# Altium PCB cb_v2.PcbDoc
Units mm, origin at the board's own origin, x right, y up, seen from the top; angles counter-clockwise.
Board outline 140 x 55 mm, 2 copper layers (Top Layer, Bottom Layer); 57 components, 55 nets, 212 pads, 44 vias.
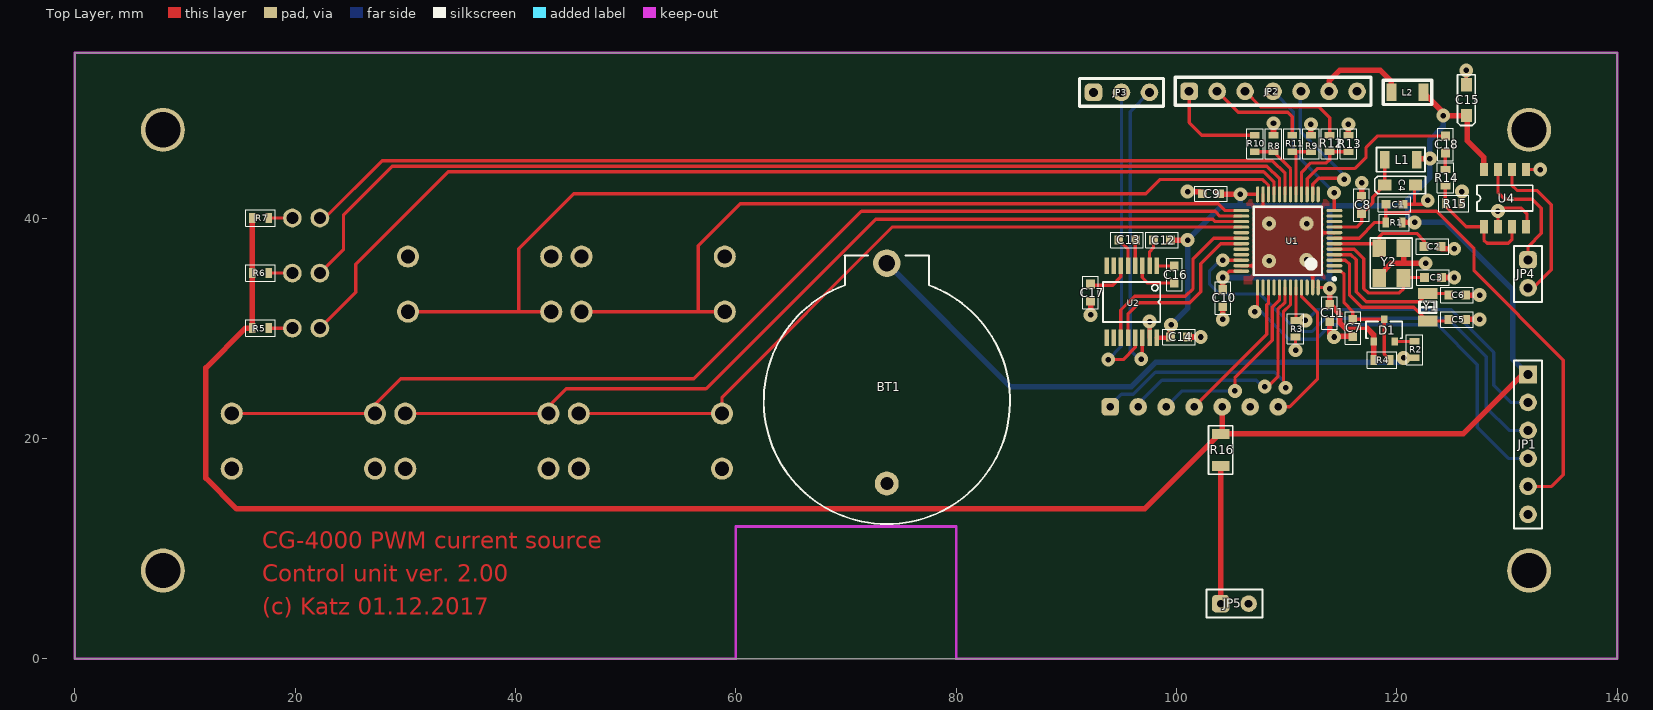
[diagram p0: Top Layer view]
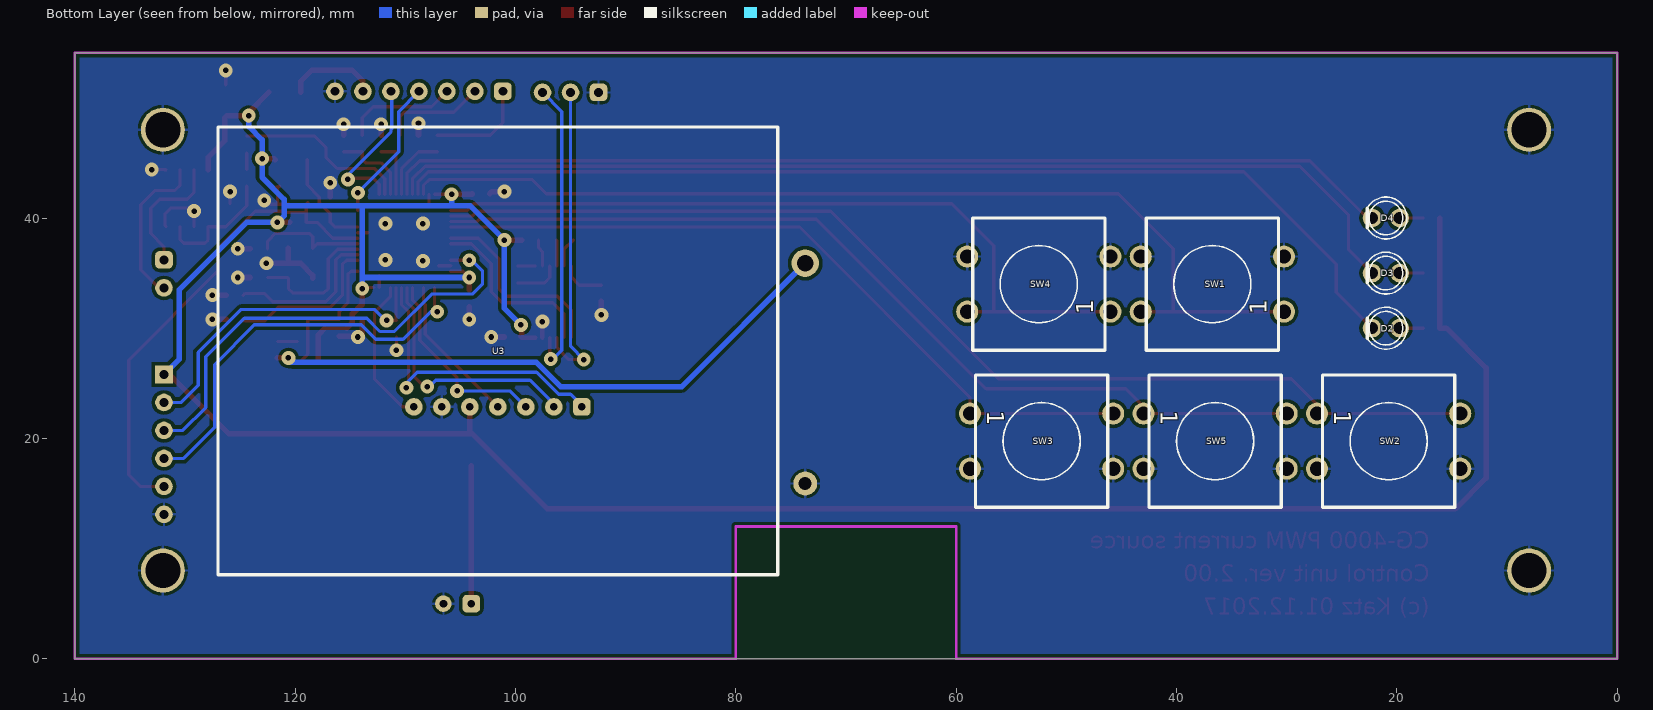
[diagram p1: Bottom Layer view, seen from below]

## Layer stack, top to bottom
Top Solder: solder mask 0.0102, Solder Resist, Dk 3.5
Top Layer: signal copper 0.0356
Dielectric1: dielectric 0.32, FR-4, Dk 4.8
Bottom Layer: signal copper 0.0356
Bottom Solder: solder mask 0.0102, Solder Resist, Dk 3.5

## Board outline
0,0 140,0 140,55 0,55

## Design rules (kind name [scope] priority, off if disabled: settings)
Clearance Clearance_3 [InNamedPolygon('GND_CPU')] p1: gap=0.3
Clearance Clearance_2 [InNamedPolygon('GND_B')] p2: gap=0.3
Clearance Clearance_1 [InNamedPolygon('GND_T')] p3: gap=0.4
Clearance [All] p4: gap=0.2
ComponentClearance [All] p1: gap=0.1 collisioncheckmode=3 verticalgap=0.254 showdistances=FALSE
HoleSize [All] p1: absolutevalues=TRUE maxlimit=5 minlimit=0.025 maxpercent=80.000 minpercent=20.000
HoleToHoleClearance [All] p1: gap=0.25 allowstackedmicrovias=TRUE
MinimumSolderMaskSliver [All] p1: minsoldermaskwidth=0
PasteMaskExpansion [All] p1: expansion=0.1
PolygonConnect PolygonConnect_4 [All vs IsNamedPolygon('GND_CPU')] p1: connectstyle=Direct reliefconductorwidth=0.254 reliefentries=4 polygonreliefangle="90 Angle" airgapwidth=0.254
PolygonConnect PolygonConnect_3 [All vs IsNamedPolygon('GND_CPU')] p2: connectstyle=Relief reliefconductorwidth=0.3 reliefentries=4 polygonreliefangle="90 Angle" airgapwidth=0.2
PolygonConnect PolygonConnect_2 [IsVia vs IsNamedPolygon('GND_CPU')] p3: connectstyle=Direct reliefconductorwidth=0.254 reliefentries=4 polygonreliefangle="90 Angle" airgapwidth=0.254
PolygonConnect PolygonConnect_1 [IsVia vs IsNamedPolygon('GND_B')] p4: connectstyle=Direct reliefconductorwidth=0.254 reliefentries=4 polygonreliefangle="90 Angle" airgapwidth=0.254
PolygonConnect [All] p5: connectstyle=Relief reliefconductorwidth=0.254 reliefentries=4 polygonreliefangle="90 Angle" airgapwidth=0.254
RoutingVias [All] p1: holewidth=0.7 width=1.25 viastyle="Through Hole" minholewidth=0.4 minwidth=0.5 maxholewidth=1 maxwidth=2
SilkToSilkClearance [All] p1: silktosilkclearance=0
SilkToSolderMaskClearance SilkscreenOverComponentPads [IsPad] p1: minsilkscreentomaskgap=0 clearancetoexposedcopper=TRUE
SolderMaskExpansion [(IsVia)] p1: expansion=-0.12
Width [All] p1: maxlimit=3 minlimit=0.25 preferedwidth=0.3
23 further rules are at their usual default settings.

## Components (designator, comment, footprint, x,y, rotation, side; value= is the part's Value field where it differs from the comment)
BT1 "BS-7" BAT_BS-7 73.7,25.9 r270 top
C1 "100nF" C-0603 119,41.25 r0 top
C2 "22pF" C-0603 124,37.4 r180 top
C3 "22pF" C-0603 122.5,34.6 r0 top
C4 "10uF" TANTAL-A 121.7,43 r180 top
C5 "22pF" C-0603 126.25,30.8 r180 top
C6 "22pF" C-0603 124.7,33 r0 top
C7 "100nF" C-0603 116,29.25 r90 top
C8 "100nF" C-0603 116.8,40.4 r90 top
C9 "100nF" C-0603 103.9,42.2 r180 top
C10 "100nF" C-0603 104.2,33.5 r270 top
C11 "100nF" C-0603 113.9,32.15 r270 top
C12 "100nF" C-0603 99.45,38 r180 top
C13 "100nF" C-0603 96.3,38 r180 top
C14 "100nF" C-0603 101,29.2 r180 top
C15 "22uF" TANTAL-A 126.3,52.1 r270 top
C16 "100nF" C-0603 99.8,35.65 r270 top
C17 "100nF" C-0603 92.2,34 r270 top
C18 "1uF" C-0603 124.4,47.45 r270 top
D1 "BAT54C" SOT-23 117.9,28.8 r0 top
D2 "RED" LED-DIP-1 21,30 r180 bottom
D3 "GREEN" LED-DIP-1 21,35 r180 bottom
D4 "YELLOW" LED-DIP-1 21,40 r180 bottom
JP1 "Header 6" HDR1X6 131.9,25.8 r270 top
JP2 "Header 7" HDR1X7 101.14,51.5 r0 top
JP3 "Header 3" HDR1X3 92.46,51.4 r0 top
JP4 "Header 2" HDR1X2#1 131.9,36.2 r270 top
JP5 "Header 2" HDR1X2#2 104,5 r0 top
L1 "SUPRESOR" R-1206 121.8,45.3 r180 top
L2 "SUPRESOR" R-1206 119.5,51.4 r0 top
R1 "22k" R-0603 120.5,39.6 r180 top
R2 "1k" R-0603 121.6,27.3 r90 top
R3 "22k" R-0603 110.8,29.2 r90 top
R4 "nc" R-0603 119.4,27.1 r180 top
R5 "1k" R-0603 17.6,30 r180 top
R6 "1k" R-0603 17.6,35 r180 top
R7 "1k" R-0603 17.6,40 r180 top
R8 "10k" R-0603 108.8,47.5 r270 top
R9 "10k" R-0603 112.2,47.5 r270 top
R10 "10k" R-0603 107.1,46 r90 top
R11 "47k" R-0603 110.5,46 r90 top
R12 "47k" R-0603 113.9,47.5 r270 top
R13 "10k" R-0603 115.6,47.5 r270 top
R14 "100k" R-0603 124.4,44.4 r270 top
R15 "10k" R-0603 125.9,41.3 r180 top
R16 "47R" R-1206 104,17.5 r90 top
SW1 "SW-1" SW4-2 36.75,34 r0 bottom locked
SW2 "SW-1" SW4-2 20.75,19.75 r180 bottom locked
SW3 "SW-1" SW4-2 52.25,19.75 r180 bottom locked
SW4 "SW-1" SW4-2 52.5,34 r0 bottom locked
SW5 "SW-1" SW4-2 36.5,19.75 r180 bottom locked
U1 "STM32F100C4T6" TSQFP50P900X900X160-48N 110.1,37.925 r180 top
U2 "HIN202" SSOP16NW 95.9,32.4 r270 top
U3 "ECMA0896-1" ECMA0896 76.2,48.26 r0 bottom locked
U4 "TDA7050" SO8-(SOT-96-1) 127.9,39.2 r90 top
Y1 "KX-26 32.768kHz" KX-327 122.8,31.9 r90 top
Y2 "KX-9A 8MHz" KX-9A 119.5,35.9 r90 top

## Footprints (in the part's own frame and the unit in brackets; to place one, negate y for a bottom-side part, rotate by r counter-clockwise, add the part's x,y. Pads: shape width x height; smd on the part's side, far side on the other; paste and mask are expansions set on the pad)
BAT_BS-7 [mm] "Memory Protection Devices CR2032 battery holder"
  round 2.5 hole 1.5: 1(-10,0)
  round 2.17 hole 1.181: 2(10,0)
  silkscreen extent -10.7,-11.16 13.68,11.18, body extent -10.69,-11.17 13.7,11.17, height 9.02
C-0603 [mm]
  rect 0.8x0.8 smd: 1(0,0) 2(1.55,0)
  silkscreen extent -0.7,-0.7 2.25,0.7
ECMA0896 [mm]
  rrect50% 1.6x1.6 hole 0.7: 1(17.78,25.4)
  round 1.6 hole 0.7: 2(20.32,25.4) 3(22.86,25.4) 4(25.4,25.4) 5(27.94,25.4) 6(30.48,25.4) 7(33.02,25.4)
  silkscreen extent 0,0 50.8,40.64
HDR1X2#1 [mm] "Connector; Header; 2 Position"
  rrect50% 1.6x1.6 hole 0.8: 1(0,0)
  round 1.6 hole 0.8: 2(2.54,0)
  silkscreen extent -1.27,-1.27 3.81,1.27
HDR1X2#2 [mm] "Connector; Header; 2 Position"
  rrect50% 1.6x1.6 hole 0.7: 1(0,0)
  round 1.5 hole 0.7: 2(2.54,0)
  silkscreen extent -1.27,-1.27 3.81,1.27
HDR1X3 [mm] "Connector; Header; 3 Position"
  rrect50% 1.6x1.6 hole 0.8: 1(0,0)
  round 1.6 hole 0.8: 2(2.54,0) 3(5.08,0)
  silkscreen extent -1.27,-1.27 6.35,1.27
HDR1X6 [mm] "Connector; Header; 6 Position"
  rect 1.6x1.6 hole 0.8: 1(0,0)
  round 1.6 hole 0.8: 2(2.54,0) 3(5.08,0) 4(7.62,0) 5(10.16,0) 6(12.7,0)
  silkscreen extent -1.27,-1.27 13.97,1.27
HDR1X7 [mm] "Connector; Header; 7 Position"
  rrect50% 1.6x1.6 hole 0.8: 1(0,0)
  round 1.6 hole 0.8: 2(2.54,0) 3(5.08,0) 4(7.62,0) 5(10.16,0) 6(12.7,0) 7(15.24,0)
  silkscreen extent -1.27,-1.27 16.51,1.27
KX-9A [mm]
  rect 1.6x1.25 smd: 1(-1.35,-1.1) 2(1.35,-1.1) 3(1.35,1.1) 4(-1.35,1.1)
  silkscreen extent -2.29,-1.91 2.29,1.91
KX-327 [mm]
  rect 1x1.8 smd: 1(-1.25,0) 2(1.25,0)
  silkscreen extent -0.5,-0.75 0.5,0.75
LED-DIP-1 [mm]
  round 1.7 hole 1.1: A(1.25,0) K(-1.25,0)
  silkscreen extent -1.68,-1.9 1.91,1.9
R-0603 [mm]
  rect 0.6x0.9 smd: 1(0,0) 2(1.5,0)
  silkscreen extent -0.6,-0.75 2.1,0.75
R-1206 [mm]
  rect 0.9x1.6 smd: 1(0,0) 2(2.9,0)
  silkscreen extent -0.75,-1.1 3.65,1.1
SO8-(SOT-96-1) [mm]
  rect 1.2x0.7 smd: 1(0,0) 2(0,-1.27) 3(0,-2.54) 4(0,-3.81) 5(5.2,-3.81) 6(5.2,-2.54) 7(5.2,-1.27) 8(5.2,0)
  silkscreen extent 1.43,-4.44 3.77,0.64
SOT-23 [mm]
  rect 0.6x0.7 smd: 1(0,0) 2(0.95,2) 3(1.9,0)
  silkscreen extent -0.7,0.3 2.6,1.8
SSOP16NW [mm]
  rect 1.5x0.4 smd: 1(-3.25,2.3) 2(-3.25,1.65) 3(-3.25,1) 4(-3.25,0.35) 5(-3.25,-0.3) 6(-3.25,-0.95) 7(-3.25,-1.6) 8(-3.25,-2.25) 9(3.25,-2.25) 10(3.25,-1.6) 11(3.25,-0.95) 12(3.25,-0.3) 13(3.25,0.35) 14(3.25,1) 15(3.25,1.65) 16(3.25,2.3)
  silkscreen extent -1.79,-2.58 1.84,2.63
SW4-2 [mm]
  round 2 hole 1.3: 1(-6.5,2.5) 2(-6.5,-2.5) 3(6.5,-2.5) 4(6.5,2.5)
  silkscreen extent -6,-6 6,6
TANTAL-A [mm]
  rect 1.2x1 smd: 1(0,0) 2(2.8,0)
  silkscreen extent -0.9,-0.8 3.7,0.8
TSQFP50P900X900X160-48N [mm] "TSQFP, 48-Leads, Body 7,00x7,00mm, Pitch 0,50mm, IPC Medium Density"
  oval 1.45x0.3 smd: 1(-4.225,2.75) 2(-4.225,2.25) 3(-4.225,1.75) 4(-4.225,1.25) 5(-4.225,0.75) 6(-4.225,0.25) 7(-4.225,-0.25) 8(-4.225,-0.75) 9(-4.225,-1.25) 10(-4.225,-1.75) 11(-4.225,-2.25) 12(-4.225,-2.75) 25(4.225,-2.75) 26(4.225,-2.25) 27(4.225,-1.75) 28(4.225,-1.25) 29(4.225,-0.75) 30(4.225,-0.25) 31(4.225,0.25) 32(4.225,0.75) 33(4.225,1.25) 34(4.225,1.75) 35(4.225,2.25) 36(4.225,2.75)
  oval 0.3x1.45 smd: 13(-2.75,-4.225) 14(-2.25,-4.225) 15(-1.75,-4.225) 16(-1.25,-4.225) 17(-0.75,-4.225) 18(-0.25,-4.225) 19(0.25,-4.225) 20(0.75,-4.225) 21(1.25,-4.225) 22(1.75,-4.225) 23(2.25,-4.225) 24(2.75,-4.225) 37(2.75,4.225) 38(2.25,4.225) 39(1.75,4.225) 40(1.25,4.225) 41(0.75,4.225) 42(0.25,4.225) 43(-0.25,4.225) 44(-0.75,4.225) 45(-1.25,4.225) 46(-1.75,4.225) 47(-2.25,4.225) 48(-2.75,4.225)
  silkscreen extent -4.35,-3.1 3.1,3.57, body extent -4.5,-4.5 4.5,4.5, height 1.6

## Part data
BT1: "Battery Holder, CR2032, Retainer clip, TH"
C1 C2 C3 C5 C6 C7 C8 C9 C10 C11 C12 C13 C14 C16 C17 C18: library part CAPN
C4 C15: library part CAPP
D1: library part BAV70
D2 D3 D4: library part LED
JP1: "Header, 6-Pin"
JP2: "Header, 7-Pin"
JP3: "Header, 3-Pin"
JP4 JP5: "Header, 2-Pin"
R1 R2 R3 R4 R5 R6 R7 R8 R9 R10 R11 R12 R13 R14 R15 R16: library part RES
U1: library part STM32F100CxT6
U2: "RS232 driver"
U3: library part ECMA0896
Y1: library part Y
Y2: library part "TSX-3225 24.0000MF20G-AC3", "Crystal, 24 MHz, 9 pF, SMD"

## Free pads (board coordinates)
  round 4 hole 3.2: 0(8,8) 1(8,48) 2(132,48) 3(132,8)

## Via types
v1: diameter 1.25, hole 0.5, Top Layer to Bottom Layer, 44 vias

## Nets (pads, with @x,y where several pads share a name; then routed paths per layer and width w, separated by ;. In a path a pad name is that pad's centre, name@x,y a point inside that pad or via, vN(x,y) a via of type N, cw(c..) or ccw(c..) an arc to the next point about the centre after c; other vN are vias at no path point)
A0: U1.43 U3.1 | length 27.7
  Top Layer w0.3: v1(109.9,24.6) 110.1,24.8 109.7,25.2 109.7,31.5 110.35,32.15 U1.43
  Bottom Layer w0.3: U3.1@94,23 95,24 96.087,24 98.087,26 108.9,26 110.1,24.8 v1(109.9,24.6)
ADC_N: R12.2 R13.2 U1.16 | length 7.4
  Top Layer w0.3: U1.16 111.35,44.15 112.2,45 113.6,45 113.9,45.3 R12.2 R13.2
ADC_P: R9.2 R11.1 U1.17 | length 5.2
  Top Layer w0.3: U1.17 110.85,46 R9.2
BOOT0: JP1.2 R3.2 U1.44 | length 29.8
  Top Layer w0.3: U1.44 110.85,30.75 R3.2 v1(111.7,30.7)
  Bottom Layer w0.3: v1(111.7,30.7) 111.8,30.7 112.8,31.7 124.9,31.7 128.8,27.8 128.8,24.8 130.34,23.26 JP1.2
CS: U1.42 U3.2 | length 22.8
  Top Layer w0.3: v1(108,24.7) 108.252,24.952 108.552,24.952 109.2,25.6 109.2,31.707 109.85,32.357 U1.42
  Bottom Layer w0.3: U3.2 96.52,23.12 98.675,25.275 107.225,25.275 v1@107.9,24.6
DAC_BEEP: C18.1 U1.15 | length 16.1
  Top Layer w0.3: U1.15 111.85,43.55 112.8,44.5 116.2,44.5 117.2,45.5 117.2,46.4 118.25,47.45 C18.1
DAC_VCONT: JP2.5 U1.14 | length 13.7
  Top Layer w0.3: U1.14 112.35,43.05 112.9,43.6 115.1,43.6 v1(115.2,43.5)
  Bottom Layer w0.3: JP2.5 111.225,51.425 111.225,48.096 111.3,48.021 111.3,47.8 115.2,43.9 v1(115.2,43.5)
EN: JP2.4 U1.12 | length 13.1
  Top Layer w0.3: v1(114.3,42.3) 114.325,42.275 U1.12
  Bottom Layer w0.3: JP2.4 110.6,49.66 110.6,46 v1(114.3,42.3)
GND: BT1.2 C1.2 C2.1 C3.2 C4.1 C5.1 C6.2 C7.1 C8.2 C9.2 C10.2 C11.2 C14.1 C15.1 C17.2 JP1.6 JP2.7 JP3.1 JP5.2 pad.0 pad.1 pad.2 pad.3 R3.1 R8.1 R9.1 R13.1 R15.1 SW1.2 SW1.3 SW2.2 SW2.3 SW3.2 SW3.3 SW4.2 SW4.3 SW5.2 SW5.3 U1.8 U1.23 U1.35 U1.47 U2.15 U3.6 U4.2 U4.4 U4.5 Y2.2 Y2.4 | length 44.6
  Top Layer w0.3: U1.35 106.975,35.675 ; 107.85,41.05 U1.23 ; v1(110.8,28) R3.1 ; U1.47 112.35,34.75 ; 113.375,38.675 U1.8 ; C1.2 122.45,41.25 v1(122.8,41.6) ; 121.6,41.25 121.6,42.7 121.4,42.9 C4.1@121.7,42.8 ; R15.1 v1@125.9,42.2 ; C15.1 v1(126.3,53.4) ; U4.2 v1(129.17,40.63) 129.44,40.9 131.3,40.9 131.8,40.4 131.8,39.29 U4.4 ; U4.5@131.8,44.31 U4.5 v1(133,44.4)
  Top Layer w0.4: U2.15 v1(97.55,30.6)
  Top Layer w0.5: v1(92.2,31.2) C17.2 ; C14.1 v1(102.2,29.2) ; v1(101,42.4) 102.15,42.4 C9.2 ; v1@104.2,30.6 v1(104.2,30.8) C10.2 ; R8.1 v1(108.8,48.6) ; R9.1 v1(112.2,48.5) ; C11.2 113.9,29.5 114.15,29.25 C7.1 ; R13.1 v1(115.6,48.5) ; C8.2 v1(116.8,43.2) ; Y2.4 118.4,34.8 119.5,35.9 v1(122.6,35.9) ; 120.6,36 Y2.2 ; C3.2 v1(125.2,34.6) ; C2.1@124.05,37.2 v1(125.2,37.2) v1@125.4,37.2 ; C5.1 v1(127.5,30.8) ; C6.2 v1(127.5,33)
  other v1: 114.3,29.2 108.4,36.1 111.8,36.2 108.4,39.5 111.8,39.5 125.9,42.4
K0: SW1.1 SW1.4 U1.22 | length 91
  Top Layer w0.3: SW1.1@30.25,32.15 SW1.1 40.3,31.5 ; SW1.4 40.3,31.5 ; U1.22 108.35,42.95 107.8,43.5 98.5,43.5 97.2,42.2 45.3,42.2 40.3,37.2 40.3,31.5
K1: SW4.1 SW4.4 U1.25 | length 70.1
  Top Layer w0.3: SW4.1 56.6,31.5 ; SW4.4 56.6,31.5 ; U1.25 104.425,40.675 103.8,41.3 60.4,41.3 56.6,37.5 56.6,31.5
K2: SW2.1 SW2.4 U1.26 | length 99.9
  Top Layer w0.3: SW2.4 SW2.1 27.25,23.05 29.6,25.4 56.2,25.4 71.4,40.6 103.5,40.6 103.925,40.175 U1.26
K3: SW5.1 SW5.4 U1.27 | length 83.7
  Top Layer w0.3: SW5.4 SW5.1 43,22.9 44.6,24.5 57.3,24.5 72.7,39.9 103.3,39.9 103.525,39.675 U1.27
K4: SW3.1 SW3.4 U1.28 | length 68
  Top Layer w0.3: SW3.4 SW3.1 58.75,23.75 74.175,39.175 U1.28
LED1: D2.K U1.21 | length 95.5
  Top Layer w0.3: D2.K 25.5,33.25 25.5,35.8 33.9,44.2 107.9,44.2 108.85,43.25 U1.21
LED2: D3.K U1.20 | length 94.8
  Top Layer w0.3: D3.K 24.4,37.15 24.4,40.3 28.8,44.7 108.207,44.7 109.35,43.557 U1.20
LED3: D4.K U1.19 | length 92.1
  Top Layer w0.3: D4.K 22.7,40 27.9,45.2 108.7,45.2 109.85,44.05 U1.19
NetBT1_1: BT1.1 R2.1 | length 53.7
  Top Layer w0.5: v1(120.6,27.3) R2.1
  Bottom Layer w0.5: BT1.1 84.9,24.7 95.9,24.7 98.1,26.9 120.3,26.9 120.6,27.2 v1(120.6,27.3)
NetC2_2: C2.2 U1.6 Y2.3 | length 10.5
  Top Layer w0.3: U1.6 117.975,37.675 Y2.3 118.4,38.3 118.7,38.6 121.8,38.6 122.5,37.9 C2.2@122.5,37.2
NetC3_1: C3.1 U1.5 Y2.1 | length 12.5
  Top Layer w0.3: U1.5 116.125,37.175 117,36.3 117,33.6 117.4,33.2 120.2,33.2 120.6,33.6 Y2.1 120.65,34.6 C3.1
NetC4_2: C4.2 C8.1 L1.2 U1.9 | length 9.2
  Top Layer w0.3: U1.9 116.375,39.175 116.8,39.6 C8.1 117.8,41.4 117.8,41.9 C4.2 L1.2
NetC5_2: C5.2 U1.3 Y1.1 | length 14.4
  Top Layer w0.3: U1.3 115.325,36.175 115.7,35.8 115.7,33 116.8,31.9 121.55,31.9 Y1.1 124.55,30.65 C5.2
NetC6_1: C6.1 U1.4 Y1.2 | length 14.2
  Top Layer w0.3: U1.4 115.825,36.675 116.3,36.2 116.3,33.3 117.2,32.4 122.05,32.4 Y1.2 124.55,33.15 C6.1
NetC12_2: C12.2 U2.2 | length 2.5
  Top Layer w0.3: U2.2 97.55,36.95 97.9,37.3 C12.2
NetC13_1: C13.1 U2.4 | length 2.4
  Top Layer w0.3: U2.4 96.25,37.95 C13.1
NetC13_2: C13.2 U2.5 | length 2.7
  Top Layer w0.3: C13.2 95.6,37.15 U2.5
NetC16_1: C16.1 U2.1 | length 1.6
  Top Layer w0.3: U2.1 C16.1
NetC16_2: C16.2 U2.3 | length 4.2
  Top Layer w0.3: U2.3 96.9,34.6 97.4,34.1 C16.2
NetC17_1: C17.1 U2.6 | length 4.1
  Top Layer w0.3: C17.1@92.2,33.9 94.2,33.9 94.95,34.65 U2.6
NetC18_2: C18.2 R14.1 | length 1.5
  Top Layer w0.3: R14.1 C18.2
NetD1_3: D1.3 R2.2 | length 1.8
  Top Layer w0.3: D1.3 R2.2
NetD2_A: D2.A R5.1 | length 2.2
  Top Layer w0.3: R5.1 D2.A
NetD3_A: D3.A R6.1 | length 2.2
  Top Layer w0.3: R6.1 D3.A
NetD4_A: D4.A R7.1 | length 2.2
  Top Layer w0.3: R7.1 D4.A
NetJP2_1: JP2.1 R10.2 | length 9.3
  Top Layer w0.3: JP2.1 101.14,48.66 102.3,47.5 R10.2
NetJP2_2: JP2.2 R11.2 | length 9.5
  Top Layer w0.3: JP2.2 105.58,49.6 110.1,49.6 110.5,49.2 R11.2
NetJP2_3: JP2.3 R12.1 | length 10.3
  Top Layer w0.3: JP2.3 107.62,50.1 112.9,50.1 113.9,49.1 R12.1
NetJP2_6: JP2.6 L2.1 | length 8.4
  Top Layer w0.5: JP2.6 113.84,52.44 114.8,53.4 118.5,53.4 119.5,52.4 L2.1
NetJP4_1: JP4.1 U4.7 | length 11.8
  Top Layer w0.3: U4.7 129.17,42.33 129.8,41.7 132.3,41.7 133.1,40.9 133.1,38.6 131.9,37.4 JP4.1
NetJP4_2: JP4.2 U4.6 | length 14.3
  Top Layer w0.3: U4.6 130.44,42.96 130.9,42.5 132.7,42.5 134,41.2 134,35.3 JP4.2@132.13,33.43
NetJP5_1: JP5.1 R16.1 | length 12.5
  Top Layer w0.5: JP5.1 R16.1
NetR14_2: R14.2 R15.2 U4.1 U4.3 | length 11.3
  Top Layer w0.3: R14.2 R15.2 124.4,41.1 126.3,39.2 U4.1 127.9,38 128.2,37.7 130.1,37.7 130.44,38.04 U4.3
R\E\S\E\T\: C1.1 JP1.5 R1.2 U1.7 | length 44
  Top Layer w0.3: U1.7 116.575,38.175 118,39.6 R1.2 119,40.425 ; C1.1@118.85,41.4 C1.1 119,40.5 121.095,40.5 121.195,40.6 123.6,40.6 127,37.2 127,35.2 135.1,27.1 135.1,16.7 134.04,15.64 JP1.5
RESETLCD: U1.45 U3.7 | length 13.5
  Top Layer w0.3: U3.7 110.26,22.86 112.8,25.4 112.8,31.4 111.35,32.85 U1.45
RXD0: U1.31 U2.12 | length 16.6
  Top Layer w0.3: U2.12 95.6,31.3 96.6,32.3 101.2,32.3 102.2,33.3 102.2,35.85 104.025,37.675 U1.31
RXD232: JP3.2 U2.13 | length 28.6
  Top Layer w0.3: v1(93.8,27.15) 95.15,27.15 96.25,28.25 U2.13
  Bottom Layer w0.3: v1(93.8,27.15) 95,28.35 JP3.2
SCLK: U1.39 U3.4 | length 13.6
  Top Layer w0.3: U3.4 108.2,29.46 108.2,32.121 108.35,32.271 U1.39
SDATA: U1.41 U3.3 | length 17.9
  Top Layer w0.3: v1(105.3,24.3) 105.3,25.5 108.7,28.9 108.7,31.914 109.35,32.564 U1.41
  Bottom Layer w0.3: U3.3 100.5,24.3 v1(105.3,24.3)
SENSE: R8.2 R10.1 U1.18 | length 6.2
  Top Layer w0.3: R10.1 R8.2 110.35,44.45 U1.18
SWCLK: JP1.4 U1.37 | length 37
  Top Layer w0.3: v1(107.1,31.5) 107.1,31.7 107.35,31.95 U1.37
  Bottom Layer w0.3: v1(107.1,31.5) 107.7,31.5 110.2,29 112.7,29 114,30.3 123.7,30.3 127.3,26.7 127.3,21 130.12,18.18 JP1.4
SWDIO: JP1.3 U1.34 | length 42.6
  Top Layer w0.3: v1(104.2,36.175) U1.34
  Bottom Layer w0.3: v1(104.2,36.175) 103.975,36.175 103,35.2 103,34 103.9,33.1 107.6,33.1 111,29.7 112.3,29.7 113.5,30.9 124.6,30.9 128.1,27.4 128.1,22.8 130.18,20.72 JP1.3
TXD0: U1.30 U2.11 | length 17.7
  Top Layer w0.3: U2.11 94.95,31.65 96.2,32.9 100.8,32.9 101.5,33.6 101.5,36.3 103.375,38.175 U1.30
TXD232: JP3.3 U2.14 | length 27.7
  Top Layer w0.3: v1(96.8,27.2) 96.6,27.2 96.9,27.5 U2.14
  Bottom Layer w0.3: v1(96.8,27.2) 96.6,27.2 95.8,28 95.8,49.66 JP3.3
VBATT: C7.2 D1.2 R4.1 U1.1 | length 12.2
  Top Layer w0.3: U1.1 114.925,35.175 115.2,34.9 115.2,32.3 116,31.5 C7.2 D1.2 118.85,27.65 R4.1
VCC: C9.1 C10.1 C11.1 C12.1 C14.2 C15.2 D1.1 JP1.1 L1.1 L2.2 R1.1 R4.2 R5.2 R6.2 R7.2 R16.2 U1.24 U1.36 U1.48 U2.16 U3.5 U4.8 | length 267
  Top Layer w0.3: v1(104.2,34.6) 104.775,35.175 U1.36 ; v1(105.8,42.15) U1.24 ; U1.48 v1@113.8,33.7 ; 115.3,30 117.3,30 ; C15.2@126.2,49.3 C15.2@126.4,49.1
  Top Layer w0.4: U2.16 C14.2@99.45,29.15
  Top Layer w0.5: R7.2 R6.2 R5.2 15.5,30 11.9,26.4 11.9,16.4 14.7,13.6 97.1,13.6 104.14,20.64 U3.5 ; v1@99.45,30.05 C14.2 C14.2@99.5,29.25 ; C12.1 v1(101,38) ; C9.1 103.95,42.15 v1(105.8,42.15) ; R16.2@104.14,20.4 126,20.4 131.4,25.8 JP1.1 ; C10.1 v1(104.2,34.6) ; v1@113.8,33.7 v1(113.9,33.6) C11.1 113.95,32.15 114.8,31.3 114.8,30.5 115.3,30 ; 117.3,30 117.9,29.4 D1.1 R4.2 ; R1.1 v1(121.6,39.6) ; L1.1 121.9,45.4 v1(123,45.4) v1@123,45.5 ; L2.2 124.2,49.6 v1(124.2,49.3) C15.2@126.2,49.3 ; C15.2@126.4,49.1 126.4,47 127.9,45.5 U4.8
  Bottom Layer w0.5: v1(99.5,30.3) 101,31.8 v1(101,38) 104.1,41.1 105.8,41.1 ; v1(104.2,34.6) 113.9,34.6 ; v1@105.45,42.15 v1(105.8,42.15) 105.8,41.1 ; v1(113.9,33.6) 113.9,34.6 ; 121,41.1 113.9,41.1 ; v1(124.2,49.3) 124.2,48.3 123,47.1 v1(123,45.4) 123,43.7 121,41.7 121,40.2 v1(121.6,39.6) 124.4,39.6 130.5,33.5 130.5,27.2 JP1.1 ; 105.8,41.1 113.9,41.1 ; 113.9,34.6 113.9,41.1
pads on no net: U1.2 U1.10 U1.11 U1.13 U1.29 U1.32 U1.33 U1.38 U1.40 U1.46 U2.7 U2.8 U2.9 U2.10

## Polygon pours and split planes (outlines as drawn)
GND on Bottom Layer "GND_B" (solid, remove dead copper, pour order 1002): 0,0 140,0 140,55 0,55
GND on Top Layer "GND_CPU" (solid, remove dead copper, pour order 1004): 106.1,41.7 114.325,41.7 114.325,34 106.1,34

## Keep-outs
Keep-Out Layer:
  lines w0.254: 0,0 0,55 140,55 140,0 80,0 80,12 60,12 60,0 0,0

## Other copper
Top Layer:
  text "CG-4000 PWM current source" at 17,10 h1.52
  text "Control unit ver. 2.00" at 17,7 h1.52
  text "(c) Katz 01.12.2017" at 17,4 h1.52

## Text inside footprints (layer, text, board x,y; h text height)
SW1: Bottom Overlay "1" at 31.8,31.26 h1.52 r270
SW2: Bottom Overlay "1" at 25.7,22.49 h1.52 r90
SW3: Bottom Overlay "1" at 57.2,22.49 h1.52 r90
SW4: Bottom Overlay "1" at 47.55,31.26 h1.52 r270
SW5: Bottom Overlay "1" at 41.45,22.49 h1.52 r90